# Altium PCB Sinistro_ASP_RevA.PcbDoc (part 2 of 5)
Units mm, origin at the board's own origin, x right, y up, seen from the top; angles counter-clockwise.
Board outline 150 x 110 mm, 8 copper layers (Top Layer (.GTL), MidLayer1 (.G1), +28V and VCC (.GP1), A and D grounds (.GP2), Earth GND (.GP3), +5ANA (.GP4), -5ANA (.GP5), Bottom Layer (.GBL)); 383 components, 275 nets, 1751 pads, 521 vias.
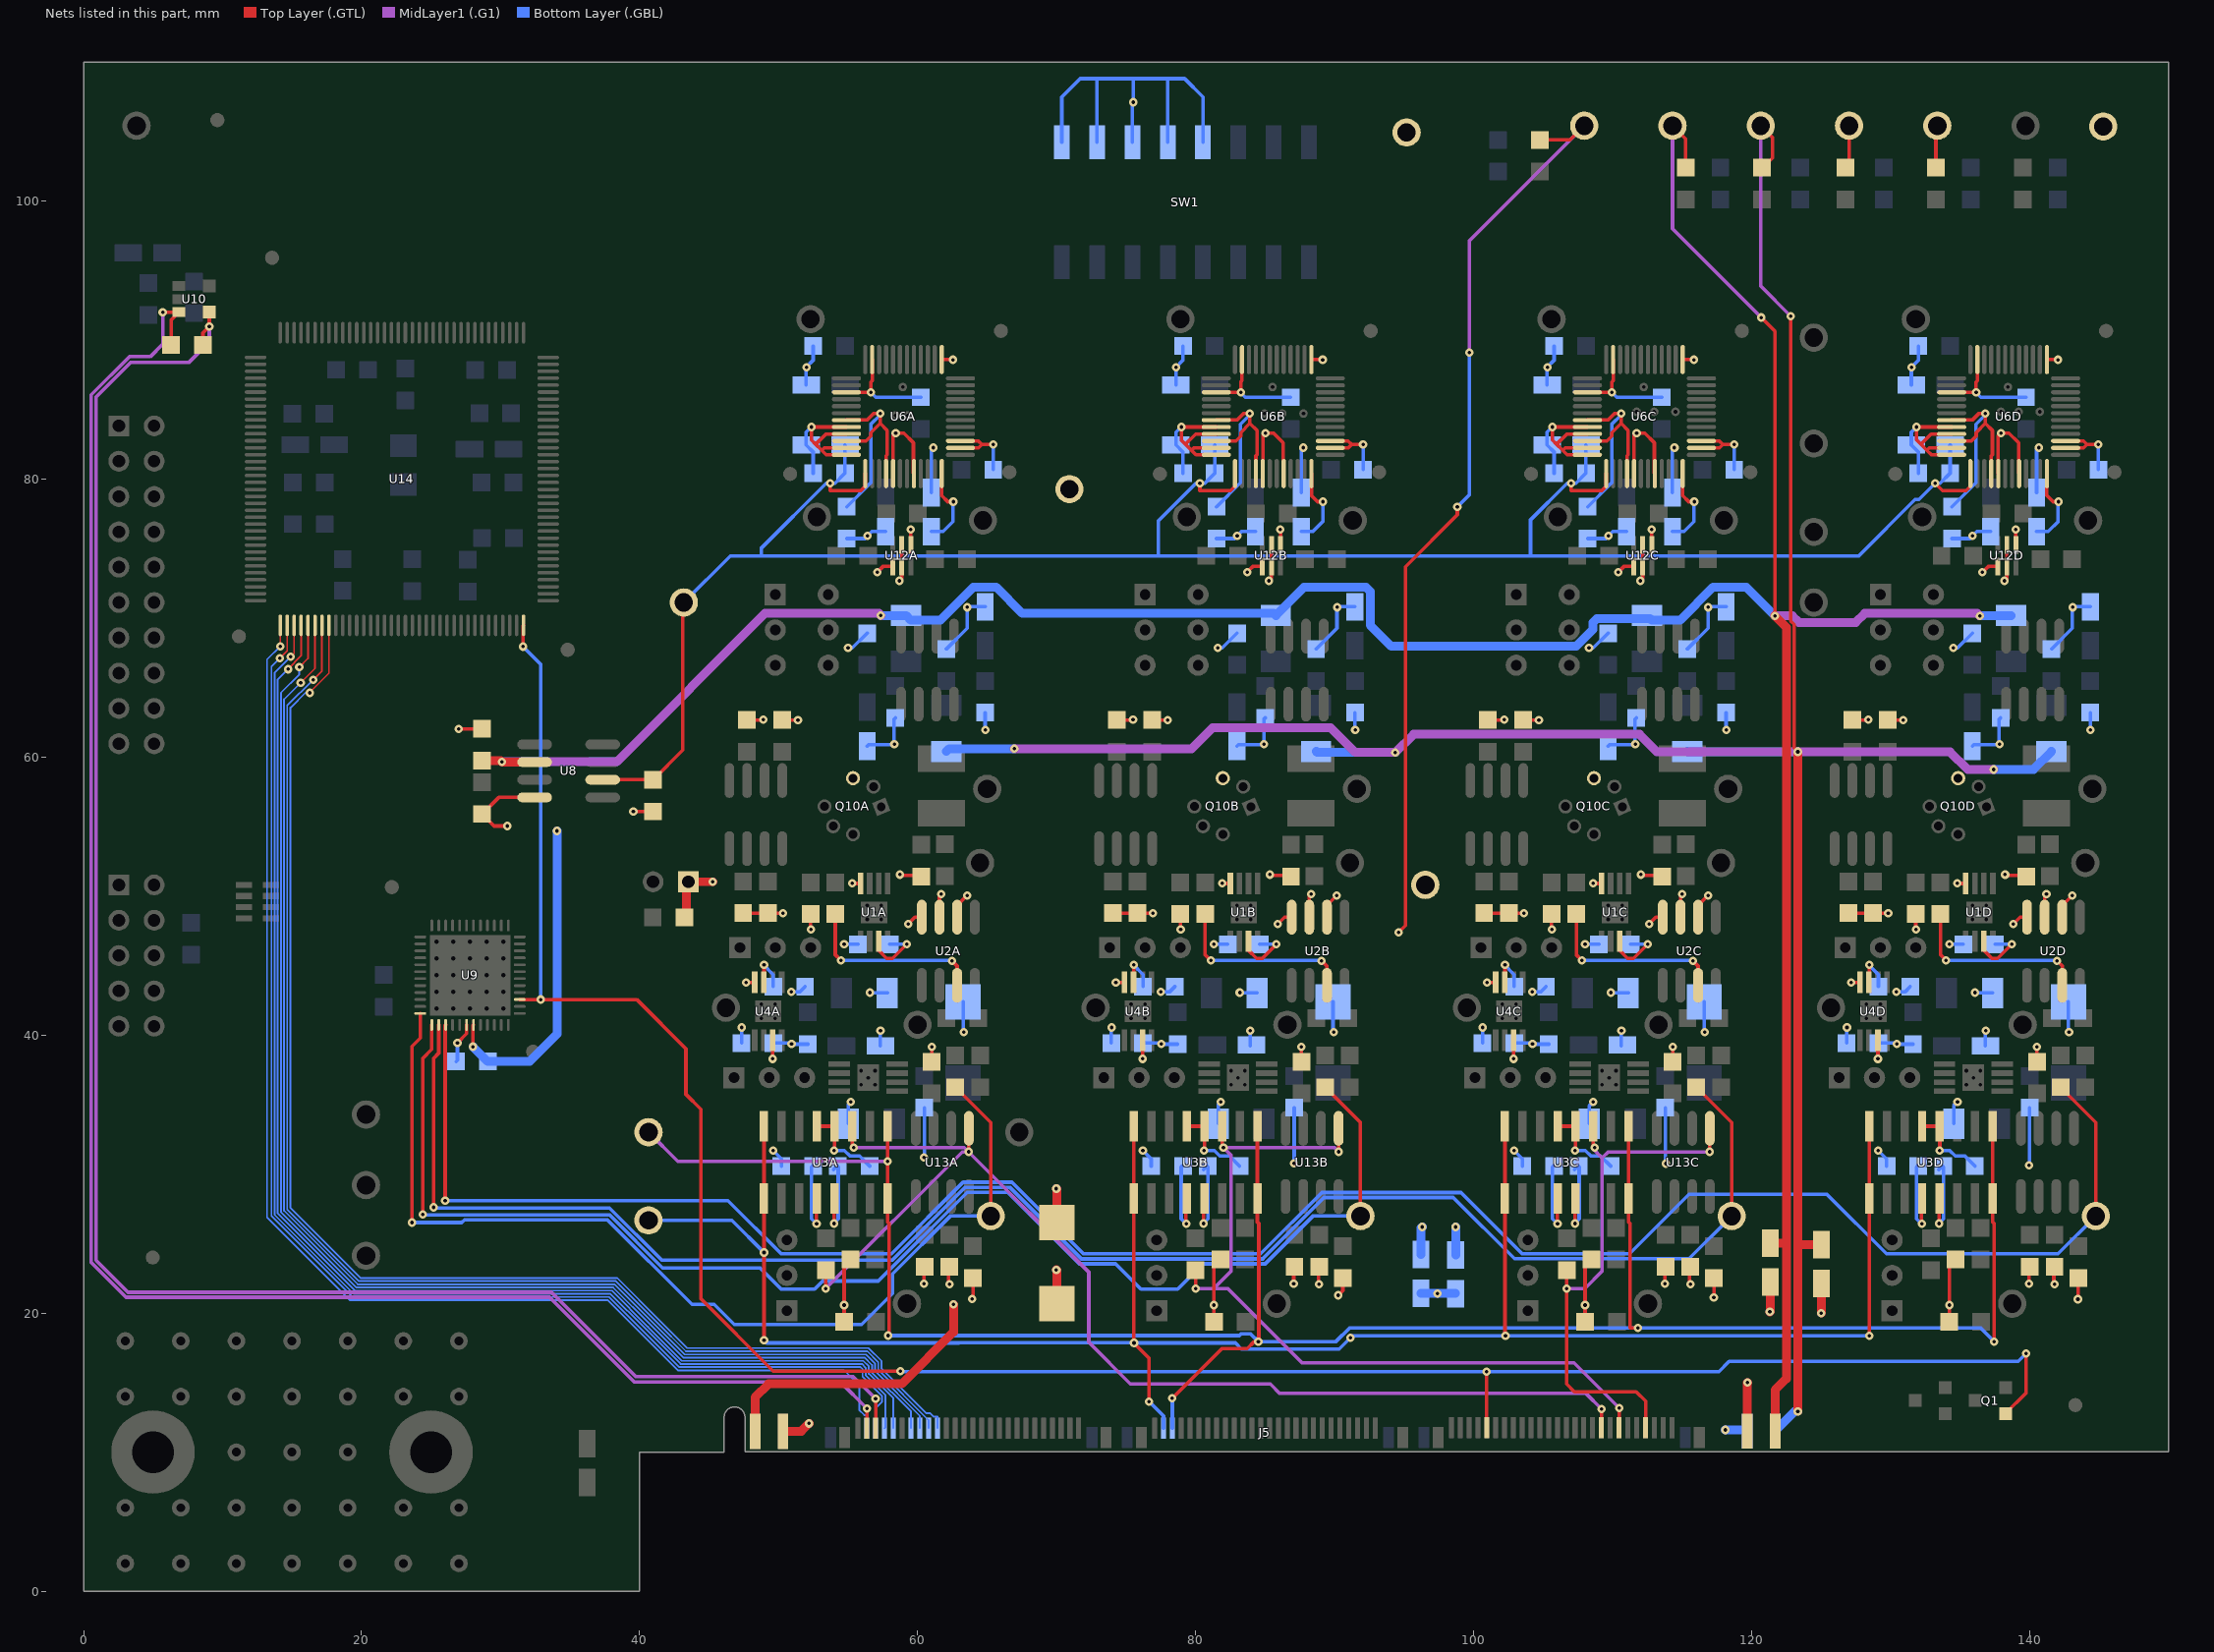
[diagram p8: the nets of this part, all layers, seen from the top]

## Part data
C1A C1B C1C C1D C2 C7 C8A C8B C8C C8D C17A C17B C17C C17D C18A C18B C18C C18D C19A C19B C19C C19D C20A C20B C20C C20D C22A C22B C22C C22D C23A C23B C23C C23D C25A C25B C25C C25D C26A C26B C26C C26D C27 C28A C28B C28C C28D C29A C29B C29C C29D C33 C34 C35 C36 C37 C38 C39 C40 C41 C42 C43 C47 C49A C49B C49C C49D C50 C51 C52 C56 C60 C61: "Capacitor"
C3A C3B C3C C3D C4A C4B C4C C4D C5A C5B C5C C5D C6A C6B C6C C6D C9A C9B C9C C9D C11A C11B C11C C11D C12A C12B C12C C12D C13A C13B C13C C13D C14A C14B C14C C14D C46A C46B C46C C46D: library part "Cap SMD", "Capacitor"
C10A C10B C10C C10D C59: library part "Cap Tant 35V", "outline 6.0mm x 3.2mm"
C15A C15B C15C C15D C16A C16B C16C C16D C21A C21B C21C C21D C24A C24B C24C C24D C31A C31B C31C C31D C32 C44 C45 C48A C48B C48C C48D C53 C54 C55 C57 C58: library part "Cap Tant 15V", "outline 3.2mm x 1.6mm"
C30A C30B C30C C30D: library part "Cap Pol1"
D1 D2 D3 D4 D5 D6: "Typical BLUE SiC LED"
J5: "SAMTEC QMSS W/PWR PINS"
L5: library part INDUCTOR1
P1: "Header, 10-Pin, Dual row"
P2: "Header, 2-Pin"
P3: "Header, 5-Pin, Dual row"
Q1: "P-MOSFET LOGIC LEVEL"
Q10A Q10B Q10C Q10D: "N-JFET NJ450L Process"
R1A R1B R1C R1D R2A R2B R2C R2D R5A R5B R5C R5D: library part "Res Match Pair"
R3A R3B R3C R3D R4A R4B R4C R4D R6A R6B R6C R6D R7A R7B R7C R7D R9A R9B R9C R9D R10A R10B R10C R10D R11A R11B R11C R11D R12A R12B R12C R12D R13A R13B R13C R13D R14A R14B R14C R14D R15A R15B R15C R15D R16A R16B R16C R16D R17A R17B R17C R17D R20A R20B R20C R20D R21 R22 R23 R24 R25 R26 R27: "Resistor"
R8A R8B R8C R8D: library part "Res Matched Quad"
R18A R18B R18C R18D R19A R19B R19C R19D: library part Res2, "Resistor"
RN1: "Resistor Array 4 Isolated"
SW1: "SW-SMD 8-pos SPST"
TP1A TP1B TP1C TP1D TP2A TP2B TP2C TP2D TP3A TP3B TP3C TP3D TP4A TP4B TP4C TP4D TP5A TP5B TP5C TP5D TP6A TP6B TP6C TP6D TP7A TP7B TP7C TP7D TP8 TP9A TP9B TP9C TP9D TP10A TP10B TP10C TP10D TP11 TP12 TP13 TP19 TP20 TP21 TP22 TP23 TP24 TP26: "Test Point"
TP14 TP15 TP16 TP17 TP18 TP25 TP27 TP28 TP29 TP30 TP31: library part "Test point", "Test Point"
U1A U1B U1C U1D U4A U4B U4C U4D U5A U5B U5C U5D: "Low Noise, High Speed Amplifier"
U3A U3B U3C U3D: "DG213 QUAD NO/NC"
U6A U6B U6C U6D: library part ADS8422, "AD8422"
U7A U7B U7C U7D: "DIFF AMP"
U8: library part VRE3401, "VREF 4.096V"
U9: "12-Bit MultChan ADC/DAC"
U11A U11B U11C U11D U13A U13B U13C U13D: "Dual Matched NPN"
U12A U12B U12C U12D: library part "Diode array", "Dual series array"
U14: "MAX II 3.3/2.5V CPLD, 116 IOs, 570 Logic Elements, 144-Pin Plastic TQFP, Commercial Temperature, Speed Grade 3"
U15: "Silicon Serial Number"

## Free pads (board coordinates)
  round 1.27 hole 0.635: 0(3,2) 0(3,6) 0(3,14) 0(3,18) 0(7,2) 0(7,6) 0(7,14) 0(7,18) 1(11,2) 1(11,6) 1(11,10) 1(11,14) 1(11,18) 2(15,2) 2(15,6) 2(15,10) 2(15,14) 2(15,18) 3(19,2) 3(19,6) 3(19,10) 3(19,14) 3(19,18) 4(23,2) 4(23,6) 4(23,14) 4(23,18) 5(27,2) 5(27,6) 5(27,14) 5(27,18)
  round 6 hole 3: 0(5,10) 1(25,10)
  round 0.61 hole 0.254: 1(58.93,86.614) 1(85.53,86.614) 1(112.23,86.614) 1(138.43,86.614) 2(58.42,84.582) 2(84.963,84.709) 2(111.722,84.836) 2(137.922,84.836) 3(87.757,84.709) 3(114.516,84.836) 3(140.716,84.836) 4(59.309,84.582) 4(86.233,84.709) 4(112.992,84.836) 4(139.192,84.836)
  round 1.016 smd mask+1.016: ""(4.978,24.003) ""(9.627,105.816) ""(143.281,13.386)
  round 1.016 smd mask+0.508: ""(11.176,68.682) ""(13.564,95.91) ""(22.174,50.648) ""(32.334,38.811) ""(34.823,67.716) ""(50.825,80.366) ""(65.989,90.653) ""(66.599,80.493) ""(77.425,80.366) ""(92.589,90.653) ""(93.199,80.493) ""(104.125,80.366) ""(119.289,90.653) ""(119.899,80.493) ""(130.325,80.366) ""(145.489,90.653) ""(146.099,80.493)

## Via types
v1: diameter 0.61, hole 0.254, Top Layer (.GTL) to Bottom Layer (.GBL), 521 vias

## Nets (pads, with @x,y where several pads share a name; then routed paths per layer and width w, separated by ;. In a path a pad name is that pad's centre, name@x,y a point inside that pad or via, vN(x,y) a via of type N, cw(c..) or ccw(c..) an arc to the next point about the centre after c; other vN are vias at no path point)
4.096VREF: C7.2 C24A.1 C24B.1 C24C.1 C24D.1 C25A.2 C25B.2 C25C.2 C25D.2 TP8.1 U6A.1 U6B.1 U6C.1 U6D.1 U8.6 | length 161
  Top Layer (.GTL) w0.254: U8.6@37.35,58.369 C7.2@40.97,58.369 43.104,60.503 TP8.1@43.104,71.12 ; 53.7,79.173 55.915,79.173 56.231,79.49 U6A.1@56.231,80.389 ; 53.7,79.194 v1(53.7,79.7) ; 80.3,79.173 82.515,79.173 82.831,79.49 U6B.1@82.831,80.389 ; 80.3,79.184 v1(80.3,79.7) ; 107,79.173 109.215,79.173 109.531,79.49 U6C.1@109.531,80.389 ; 107,79.239 v1(107,79.7) ; v1(133.2,79.7) 133.727,79.173 135.415,79.173 135.731,79.49 U6D.1@135.731,80.389
  Bottom Layer (.GBL) w0.254: TP8.1@43.18,71.12 46.533,74.473 48.768,74.473 ; C24A.1@54.772,82.45 C25A.2@54.772,80.418 54.054,79.7 v1(53.7,79.7) 53.423,79.7 48.768,75.045 48.768,74.473 ; C24B.1@81.372,82.45 C25B.2@81.372,80.418 80.654,79.7 v1(80.3,79.7) 80.023,79.7 77.318,76.995 77.318,74.473 ; C24C.1@108.072,82.45 C25C.2@108.072,80.418 107.354,79.7 v1(107,79.7) 106.723,79.7 104.089,77.066 104.089,74.473 ; C24D.1@134.272,82.45 C25D.2@134.272,80.418 133.554,79.7 v1(133.2,79.7) 132.02,78.52 131.743,78.52 127.696,74.473 104.089,74.473 ; 48.768,74.473 77.318,74.473 ; 77.318,74.473 104.089,74.473
+5ANA: C5A.2 C5B.2 C5C.2 C5D.2 C11A.2 C11B.2 C11C.2 C11D.2 C20A.2 C20B.2 C20C.2 C20D.2 C21A.1 C21B.1 C21C.1 C21D.1 C35.2 C58.1 D5.ANOD J5.PC03 R3A.1 R3B.1 R3C.1 R3D.1 R4A.1 R4B.1 R4C.1 R4D.1 TP27.1 U2A.7 U2B.7 U2C.7 U2D.7 U3A.12 U3B.12 U3C.12 U3D.12 U4A.7 U4B.7 U4C.7 U4D.7 U6A.4 U6A.43 U6A.46 U6B.4 U6B.43 U6B.46 U6C.4 U6C.43 U6C.46 U6D.4 U6D.43 U6D.46 U9.18 U12A.2 U12A.5 U12B.2 U12B.5 U12C.2 U12C.5 U12D.2 U12D.5 | length 201.1
  Top Layer (.GTL) w0.254: v1(26.899,39.446) 27.55,40.098 U9.18@27.55,40.735 ; v1(49.578,38.291) U4A.7@49.578,39.64 ; U3A.12@52.707,28.244 52.707,26.45 v1(52.733,26.424) ; R4A.1@54.079,48.7 54.079,45.779 v1(54.485,45.373) ; U6A.46@54.881,82.739 56.291,82.739 56.644,83.092 56.644,83.344 57.3,84 ; U6A.43@54.881,84.239 56.361,84.239 56.822,84.7 v1(57.3,84.7) 57.3,84 ; U6A.4@57.731,80.389 57.731,81.664 57.813,81.745 57.813,83.487 57.3,84 ; v1(58.676,72.678) 58.854,72.855 U12A.5@58.854,75.256 ; v1(58.727,51.545) 58.778,51.494 R3A.1@59.921,51.494 ; v1(62.461,45.347) 62.842,44.966 U2A.7@62.842,43.583 ; v1(76.178,38.291) U4B.7@76.178,39.64 ; U3B.12@79.307,28.244 79.307,26.45 v1(79.333,26.424) ; R4B.1@80.679,48.7 80.679,45.779 v1(81.085,45.373) ; U6B.46@81.481,82.739 82.891,82.739 83.244,83.092 83.244,83.344 83.9,84 ; U6B.43@81.481,84.239 82.961,84.239 83.422,84.7 v1(83.9,84.7) 83.9,84 ; U6B.4@84.331,80.389 84.331,81.664 84.413,81.745 84.413,83.487 83.9,84 ; v1(85.276,72.678) 85.454,72.855 U12B.5@85.454,75.256 ; v1(85.327,51.545) 85.378,51.494 R3B.1@86.521,51.494 ; v1(89.061,45.347) 89.442,44.966 U2B.7@89.442,43.583 ; v1(102.878,38.291) U4C.7@102.878,39.64 ; U3C.12@106.007,28.244 106.007,26.45 v1(106.033,26.424) ; R4C.1@107.379,48.7 107.379,45.779 v1(107.785,45.373) ; U6C.46@108.181,82.739 109.591,82.739 109.944,83.092 109.944,83.344 110.6,84 ; U6C.43@108.181,84.239 109.661,84.239 110.122,84.7 v1(110.6,84.7) 110.6,84 ; U6C.4@111.031,80.389 111.031,81.664 111.113,81.745 111.113,83.487 110.6,84 ; v1(111.976,72.678) 112.154,72.855 U12C.5@112.154,75.256 ; v1(112.027,51.545) 112.078,51.494 R3C.1@113.221,51.494 ; v1(115.761,45.347) 116.142,44.966 U2C.7@116.142,43.583 ; D5.ANOD@126.75,102.393 127,102.643 TP27.1@127,105.41 ; v1(129.078,38.291) U4D.7@129.078,39.64 ; U3D.12@132.207,28.244 132.207,26.45 v1(132.233,26.424) ; R4D.1@133.579,48.7 133.579,45.779 v1(133.985,45.373) ; U6D.46@134.381,82.739 135.791,82.739 136.144,83.092 136.144,83.344 136.8,84 ; U6D.43@134.381,84.239 135.861,84.239 136.322,84.7 v1(136.8,84.7) 136.8,84 ; U6D.4@137.231,80.389 137.231,81.664 137.313,81.745 137.313,83.487 136.8,84 ; v1(138.176,72.678) 138.354,72.855 U12D.5@138.354,75.256 ; v1(138.227,51.545) 138.278,51.494 R3D.1@139.421,51.494 ; v1(141.961,45.347) 142.342,44.966 U2D.7@142.342,43.583
  Top Layer (.GTL) w0.635: J5.PC03@119.685,12.315 J5.PC03@119.685,11.515 119.685,14.985 v1(119.7,15)
  Bottom Layer (.GBL) w0.254: C35.2@26.797,38.1 26.899,38.202 v1(26.899,39.446) ; v1(50.9,43.1) 51.515,43.1 C11A.2@51.901,43.486 ; C5A.2@52.435,30.583 52.359,30.507 52.359,26.773 v1@52.714,26.417 ; v1@54.467,45.366 62.417,45.366 v1@62.442,45.34 ; C20A.2@54.899,78.005 56.626,79.732 56.626,83.926 57.3,84.6 v1(57.3,84.7) ; C21A.1@60.995,79.021 60.995,82.12 v1@61.122,82.247 ; v1(77.5,43.1) 78.115,43.1 C11B.2@78.501,43.486 ; C5B.2@79.035,30.583 78.959,30.507 78.959,26.773 v1@79.314,26.417 ; v1@81.067,45.366 89.017,45.366 v1@89.042,45.34 ; C20B.2@81.499,78.005 83.226,79.732 83.226,83.926 83.9,84.6 v1(83.9,84.7) ; C21B.1@87.595,79.021 87.595,82.12 v1@87.722,82.247 ; v1(104.2,43.1) 104.815,43.1 C11C.2@105.201,43.486 ; C5C.2@105.735,30.583 105.659,30.507 105.659,26.773 v1@106.014,26.417 ; v1@107.767,45.366 115.717,45.366 v1@115.742,45.34 ; C20C.2@108.199,78.005 109.926,79.732 109.926,83.926 110.6,84.6 v1(110.6,84.7) ; C21C.1@114.295,79.021 114.295,82.12 v1@114.422,82.247 ; v1(130.4,43.1) 131.015,43.1 C11D.2@131.401,43.486 ; C5D.2@131.935,30.583 131.859,30.507 131.859,26.773 v1@132.214,26.417 ; v1@133.967,45.366 141.917,45.366 v1@141.942,45.34 ; C20D.2@134.399,78.005 136.126,79.732 136.126,83.926 136.8,84.6 v1(136.8,84.7) ; C21D.1@140.495,79.021 140.495,82.12 v1@140.622,82.247
  Bottom Layer (.GBL) w0.635: C58.1@96.215,24.206 96.215,26.115 v1(96.3,26.2)
  other v1: 54.485,45.373 81.085,45.373 107.785,45.373 133.985,45.373 61.14,82.253 87.74,82.253 114.44,82.253 140.64,82.253
+12V: C57.1 C60.2 D4.ANOD J5.PC01 L3A.1 L3B.1 L3C.1 L3D.1 TP25.1 U8.2 | length 228.7
  Top Layer (.GTL) w0.254: TP25.1@114.3,105.41 115.25,104.46 D4.ANOD@115.25,102.393 ; v1(120.675,91.618) 121.666,90.627 v1(121.666,70.155)
  Top Layer (.GTL) w0.635: C60.2@28.677,59.741 30.023,59.741 v1(30.099,59.665) 30.124,59.639 U8.2@32.45,59.639 ; C57.1@121.336,25.019 122.419,25.019 122.5,25.1 ; v1(121.666,70.155) 122.5,69.321 122.5,25.1 ; J5.PC01@121.689,11.538 J5.PC01@121.689,11.515 121.689,14.47 122.5,15.281 122.5,25.1
  MidLayer1 (.G1) w0.254: TP25.1@114.3,105.41 114.3,97.993 v1(120.675,91.618)
  MidLayer1 (.G1) w0.635: v1(30.099,59.665) 38.354,59.665 49.017,70.328 57.205,70.328 v1(57.353,70.18) ; v1(121.666,70.155) 122.926,70.155 123.396,69.685 127.485,69.685 128.129,70.328 136.225,70.328 v1(136.398,70.155)
  Bottom Layer (.GBL) w0.635: v1(57.353,70.18) 57.355,70.182 L3A.1@59.166,70.182 59.502,69.845 61.628,69.845 64.009,72.226 65.639,72.226 67.537,70.328 85.619,70.328 L3B.1@85.766,70.182 87.811,72.226 92.239,72.226 92.558,71.907 92.558,69.493 94.085,67.966 107.36,67.966 108.578,69.184 108.578,69.681 108.863,69.966 112.682,69.966 112.802,69.845 114.842,69.845 117.222,72.226 119.595,72.226 v1(121.666,70.155) ; v1(136.398,70.155) 138.639,70.155 L3D.1@138.666,70.182
+28V: C3A.2 C3B.2 C3C.2 C3D.2 C4A.2 C4B.2 C4C.2 C4D.2 C59.POS D3.ANOD J5.PC05 L1A.2 L1B.2 L1C.2 L1D.2 R14A.2 R14B.2 R14C.2 R14D.2 TP28.1 U1A.7 U1B.7 U1C.7 U1D.7 U3A.13 U3B.13 U3C.13 U3D.13 | length 128
  Top Layer (.GTL) w0.254: v1(53.977,26.45) U3A.13@53.977,28.244 ; U1A.7@57.198,46.752 57.198,46.104 57.777,45.525 58.194,45.525 v1(59.21,46.541) ; R14A.2@62.232,23.351 62.232,22.132 v1(62.283,22.081) ; v1(80.577,26.45) U3B.13@80.577,28.244 ; U1B.7@83.798,46.752 83.798,46.104 84.377,45.525 84.794,45.525 v1(85.81,46.541) ; R14B.2@88.832,23.351 88.832,22.132 v1(88.883,22.081) ; v1(94.6,47.4) 95.085,47.885 95.085,73.691 98.824,77.43 v1(98.824,78) ; D3.ANOD@104.75,104.393 106.933,104.393 TP28.1@107.95,105.41 ; v1(107.277,26.45) U3C.13@107.277,28.244 ; U1C.7@110.498,46.752 110.498,46.104 111.077,45.525 111.494,45.525 v1(112.51,46.541) ; R14C.2@115.532,23.351 115.532,22.132 v1(115.583,22.081) ; v1(133.477,26.45) U3D.13@133.477,28.244 ; U1D.7@136.698,46.752 136.698,46.104 137.277,45.525 137.694,45.525 v1(138.71,46.541) ; R14D.2@141.732,23.351 141.732,22.132 v1(141.783,22.081)
  Top Layer (.GTL) w0.635: J5.PC05@50.315,11.502 51.634,11.502 v1(52.197,12.065) ; v1(69.977,23.114) 70.002,23.089 C59.POS@70.002,20.676
  MidLayer1 (.G1) w0.254: v1(99.7,89.1) 99.7,97.16 TP28.1@107.95,105.41
  Bottom Layer (.GBL) w0.254: v1@53.959,26.443 54.289,26.773 54.289,30.507 C4A.2@54.213,30.583 ; C4A.2@53.959,30.329 C4A.2@54.213,30.583 ; C4A.2@54.264,30.532 C4A.2@54.213,30.583 ; L1A.2@55.026,33.631 55.026,35.026 55.3,35.3 v1(55.2,35.2) ; C3A.2@57.997,46.534 v1@59.191,46.534 ; v1@80.559,26.443 80.889,26.773 80.889,30.507 C4B.2@80.813,30.583 ; C4B.2@80.559,30.329 C4B.2@80.813,30.583 ; C4B.2@80.864,30.532 C4B.2@80.813,30.583 ; L1B.2@81.626,33.631 81.626,35.026 v1(81.8,35.2) ; C3B.2@84.597,46.534 v1@85.791,46.534 ; v1(98.824,78) 99.7,78.876 v1(99.7,89.1) ; v1@107.259,26.443 107.589,26.773 107.589,30.507 C4C.2@107.513,30.583 ; C4C.2@107.259,30.329 C4C.2@107.513,30.583 ; C4C.2@107.564,30.532 C4C.2@107.513,30.583 ; L1C.2@108.326,33.631 108.326,34.926 v1(108.6,35.2) ; C3C.2@111.297,46.534 v1@112.491,46.534 ; v1@133.459,26.443 133.789,26.773 133.789,30.507 C4D.2@133.713,30.583 ; C4D.2@133.459,30.329 C4D.2@133.713,30.583 ; C4D.2@133.764,30.532 C4D.2@133.713,30.583 ; L1D.2@134.526,33.631 134.526,34.926 v1(134.8,35.2) ; C3D.2@137.497,46.534 v1@138.691,46.534
  other v1: 62.283,22.081 88.883,22.081 115.583,22.081 141.783,22.081
+CLK_100: J5.153 R21.1 U10.3 | length 136.7
  Top Layer (.GTL) w0.254: v1(5.693,92.005) U10.3@6.862,92.005 6.303,91.446 R21.1@6.303,89.643 ; J5.153@56.348,11.729 56.348,13.117 v1(56.363,13.132)
  MidLayer1 (.G1) w0.254: v1(5.693,92.005) 5.693,89.693 4.8,88.8 3.297,88.8 0.544,86.047 0.544,23.653 3.053,21.144 33.522,21.144 39.604,15.062 54.432,15.062 v1(56.363,13.132)
-5ANA: C14A.2 C14B.2 C14C.2 C14D.2 C46A.1 C46B.1 C46C.1 C46D.1 C53.2 D2.CATH J5.PC04 L2A.2 L2B.2 L2C.2 L2D.2 R15A.2 R15B.2 R15C.2 R15D.2 R16A.2 R16B.2 R16C.2 R16D.2 TP30.1 U2A.3 U2B.3 U2C.3 U2D.3 U4A.4 U4B.4 U4C.4 U4D.4 | length 41.8
  Top Layer (.GTL) w0.254: R16A.2@47.45,48.776 v1(50.32,48.776) ; v1(47.661,43.79) U4A.4@48.278,43.79 ; R15A.2@47.729,62.67 48.872,62.67 v1(48.897,62.695) ; U2A.3@61.572,48.483 61.572,50.021 v1(61.699,50.148) ; R16B.2@74.05,48.776 v1(76.92,48.776) ; v1(74.261,43.79) U4B.4@74.878,43.79 ; R15B.2@74.329,62.67 75.472,62.67 v1(75.497,62.695) ; U2B.3@88.172,48.483 88.172,50.021 v1(88.299,50.148) ; R16C.2@100.75,48.776 v1(103.62,48.776) ; v1(100.961,43.79) U4C.4@101.578,43.79 ; R15C.2@101.029,62.67 102.172,62.67 v1(102.197,62.695) ; U2C.3@114.872,48.483 114.872,50.021 v1(114.999,50.148) ; R16D.2@126.95,48.776 v1(129.82,48.776) ; v1(127.161,43.79) U4D.4@127.778,43.79 ; R15D.2@127.229,62.67 128.372,62.67 v1(128.397,62.695) ; D2.CATH@133.25,102.393 133.25,105.31 TP30.1@133.35,105.41 ; U2D.3@141.072,48.483 141.072,50.021 v1(141.199,50.148)
  Bottom Layer (.GBL) w0.254: C14A.2@47.329,39.422 v1@47.329,40.54 ; v1@56.55,43.054 56.575,43.029 L2A.2@57.82,43.029 ; C14B.2@73.929,39.422 v1@73.929,40.54 ; v1@83.15,43.054 83.175,43.029 L2B.2@84.42,43.029 ; C14C.2@100.629,39.422 v1@100.629,40.54 ; v1@109.85,43.054 109.875,43.029 L2C.2@111.12,43.029 ; C14D.2@126.829,39.422 v1@126.829,40.54 ; v1@136.05,43.054 136.075,43.029 L2D.2@137.32,43.029
  Bottom Layer (.GBL) w0.635: v1(98.7,26.2) 98.704,26.196 C53.2@98.704,24.181 ; v1(118.1,11.6) 119.6,11.6 J5.PC04@119.685,11.515
  other v1: 47.348,40.547 73.948,40.547 100.648,40.547 126.848,40.547 56.568,43.061 83.168,43.061 109.868,43.061 136.068,43.061
-12V: C54.2 D1.CATH J5.PC02 L4A.1 L4B.1 L4C.1 L4D.1 TP31.1 | length 198
  Top Layer (.GTL) w0.254: TP31.1@120.65,105.41 121.5,104.56 121.5,103.1 120.793,102.393 D1.CATH@120.75,102.393 ; v1(122.809,91.719) 122.809,69.784 123.046,69.547 123.046,60.647 v1(123.317,60.376)
  Top Layer (.GTL) w0.635: v1(123.317,12.929) 123.317,24.9 ; v1(123.317,60.376) 123.317,24.9 ; C54.2@125.019,24.943 123.36,24.943 123.317,24.9
  MidLayer1 (.G1) w0.254: TP31.1@120.65,105.41 120.65,93.878 v1(122.809,91.719)
  MidLayer1 (.G1) w0.635: v1(66.954,60.604) 79.705,60.604 81.204,62.103 89.713,62.103 91.491,60.325 v1(94.361,60.325) 95.677,61.641 111.921,61.641 113.186,60.376 v1(123.317,60.376) 134.263,60.376 135.533,59.106 v1(137.414,59.106)
  Bottom Layer (.GBL) w0.635: L4A.1@62.061,60.403 62.263,60.604 v1(66.954,60.604) ; L4B.1@88.661,60.403 88.739,60.325 v1(94.361,60.325) ; L4C.1@115.361,60.403 115.388,60.376 v1(123.317,60.376) ; J5.PC02@121.689,11.515 123.103,12.929 v1(123.317,12.929) ; v1(137.414,59.106) 140.265,59.106 L4D.1@141.561,60.403
-CLK_100: J5.151 R21.2 U10.4 | length 137.9
  Top Layer (.GTL) w0.254: R21.2@8.589,89.643 8.589,90.507 v1(9.046,90.964) U10.4@9.046,92.005 ; v1(56.972,13.843) 56.983,13.833 J5.151@56.983,11.729
  MidLayer1 (.G1) w0.254: v1(9.046,90.964) 9.046,89.846 7.6,88.4 3.4,88.4 0.9,85.9 0.9,23.8 3.2,21.5 33.669,21.5 39.726,15.443 55.372,15.443 v1(56.972,13.843)
/GAIN_4X: J5.102 TP21.1 U3A.8 U3A.9 U3B.8 U3B.9 U3C.8 U3C.9 U3D.8 U3D.9 | length 157.8
  Top Layer (.GTL) w0.254: v1(48.948,18.059) v1(48.948,24.359) U3A.9@48.948,28.244 U3A.8@48.948,33.444 ; v1@75.548,17.678 v1@75.548,17.856 ; U3B.8@75.548,33.444 U3B.9@75.548,28.244 v1@75.548,17.856 ; v1(76.632,13.64) 76.632,16.773 v1@75.548,17.856 ; v1@102.248,18.364 U3C.9@102.248,28.244 U3C.8@102.248,33.444 ; v1@128.448,18.364 U3D.9@128.448,28.244 U3D.8@128.448,33.444
  Bottom Layer (.GBL) w0.254: TP21.1@40.64,26.67 46.637,26.67 v1(48.948,24.359) ; v1(48.948,18.059) 49.151,17.856 58.108,17.856 58.133,17.882 58.158,17.856 62.949,17.856 62.974,17.882 75.54,17.882 v1(75.565,17.856) 82.862,17.856 83.294,17.424 90.322,17.424 v1(91.135,18.237) 91.262,18.364 v1(102.286,18.364) v1(128.448,18.364) v1@128.448,18.39 ; v1(76.632,13.64) 76.657,13.64 77.688,12.609 J5.102@77.688,11.729
/RESET_BLANK: J5.100 TP20.1 U3A.1 U3A.16 U3B.1 U3B.16 U3C.1 U3C.16 U3D.1 U3D.16 | length 170.1
  Top Layer (.GTL) w0.254: U3A.1@57.838,33.444 U3A.16@57.838,28.244 57.838,26.551 57.94,26.45 v1@57.94,18.39 ; v1(78.308,13.868) 81.89,17.45 83.711,17.45 84.193,17.932 84.54,17.932 84.54,26.45 84.438,26.551 U3B.16@84.438,28.244 U3B.1@84.438,33.444 ; U3C.1@111.138,33.444 U3C.16@111.138,28.244 111.138,26.551 111.24,26.45 111.24,18.923 v1(111.799,18.923) ; U3D.1@137.338,33.444 U3D.16@137.338,28.244 137.338,26.551 137.44,26.45 v1(137.44,17.958)
  MidLayer1 (.G1) w0.254: TP20.1@40.64,33.02 42.748,30.912 v1(57.836,30.912)
  Bottom Layer (.GBL) w0.254: v1(57.887,18.39) 83.142,18.39 83.269,18.517 83.947,18.517 v1(84.506,17.958) 90.094,17.958 91.059,18.923 v1(111.799,18.923) 136.475,18.923 v1(137.44,17.958) ; v1(78.308,13.868) 78.323,13.854 J5.100@78.323,11.729
A: C3A.1 C3B.1 C3C.1 C3D.1 C4A.1 C4B.1 C4C.1 C4D.1 C5A.1 C5B.1 C5C.1 C5D.1 C7.1 C8A.1 C8B.1 C8C.1 C8D.1 C9A.2 C9B.2 C9C.2 C9D.2 C10A.NEG C10B.NEG C10C.NEG C10D.NEG C11A.1 C11B.1 C11C.1 C11D.1 C12A.1 C12B.1 C12C.1 C12D.1 C13A.1 C13B.1 C13C.1 C13D.1 C14A.1 C14B.1 C14C.1 C14D.1 C15A.1 C15B.1 C15C.1 C15D.1 C16A.2 C16B.2 C16C.2 C16D.2 C17A.1 C17B.1 C17C.1 C17D.1 C18A.2 C18B.2 C18C.2 C18D.2 C19A.2 C19B.2 C19C.2 C19D.2 C20A.1 C20B.1 C20C.1 C20D.1 C21A.2 C21B.2 C21C.2 C21D.2 C22A.1 C22B.1 C22C.1 C22D.1 C23A.1 C23B.1 C23C.1 C23D.1 C24A.2 C24B.2 C24C.2 C24D.2 C25A.1 C25B.1 C25C.1 C25D.1 C26A.2 C26B.2 C26C.2 C26D.2 C28A.2 C28B.2 C28C.2 C28D.2 C29A.1 C29B.1 C29C.1 C29D.1 C30A.2 C30B.2 C30C.2 C30D.2 C31A.1 C31B.1 C31C.1 C31D.1 C35.1 C48A.2 C48B.2 C48C.2 C48D.2 C53.1 C54.1 C56.1 C57.2 C58.2 C59.NEG C60.1 C61.1 J5.PC07 P2.1 Q10A.3 Q10B.3 Q10C.3 Q10D.3 R11A.1 R11B.1 R11C.1 R11D.1 R12A.1 R12B.1 R12C.1 R12D.1 R17A.1 R17B.1 R17C.1 R17D.1 R20A.1 R20B.1 R20C.1 R20D.1 SW1.9 SW1.10 SW1.11 SW1.12 SW1.13 TP14.1 TP15.1 TP16.1 TP17.1 U1A.4 U1B.4 U1C.4 U1D.4 U2A.2 U2A.4 U2B.2 U2B.4 U2C.2 U2C.4 U2D.2 U2D.4 U3A.4 U3A.5 U3B.4 U3B.5 U3C.4 U3C.5 U3D.4 U3D.5 U4A.3 U4B.3 U4C.3 U4D.3 U6A.5 U6A.8 U6A.12 U6A.14 U6A.15 U6A.25 U6A.35 U6A.39 U6A.44 U6A.45 U6A.47 U6A.48 U6B.5 U6B.8 U6B.12 U6B.14 U6B.15 U6B.25 U6B.35 U6B.39 U6B.44 U6B.45 U6B.47 U6B.48 U6C.5 U6C.8 U6C.12 U6C.14 U6C.15 U6C.25 U6C.35 U6C.39 U6C.44 U6C.45 U6C.47 U6C.48 U6D.5 U6D.8 U6D.12 U6D.14 U6D.15 U6D.25 U6D.35 U6D.39 U6D.44 U6D.45 U6D.47 U6D.48 U8.4 U9.19 U12A.1 U12A.4 U12B.1 U12B.4 U12C.1 U12C.4 U12D.1 U12D.4 | length 492.3
  Top Layer (.GTL) w0.254: v1(26.975,62.027) C60.1@28.677,62.027 ; v1(28.016,39.167) 28.016,40.701 U9.19@28.05,40.735 ; v1(30.48,55.042) 29.54,55.042 C61.1@28.677,55.905 29.794,57.023 29.87,57.099 U8.4@32.45,57.099 ; v1(39.548,56.083) C7.1@40.97,56.083 ; U4A.3@48.928,43.79 48.948,43.81 v1(48.948,45.042) ; R12A.1@50.269,62.67 51.361,62.67 v1(51.387,62.645) ; C8A.1@52.301,48.7 52.301,47.633 v1(52.326,47.608) ; U3A.5@52.758,33.444 U3A.4@54.028,33.444 54.028,31.728 v1(54,31.7) ; R11A.1@54.714,19.363 v1(54.714,20.582) 54.714,23.452 C12A.1@55.146,23.884 ; C12A.1@54.79,23.529 54.79,23.478 C12A.1@55.171,23.859 ; U6A.48@54.881,81.739 53.425,81.739 53.101,82.063 ; U6A.47@54.881,82.239 53.277,82.239 53.101,82.063 ; U6A.45@54.881,83.239 53.4,83.239 52.663,82.501 ; U6A.44@54.881,83.739 v1(52.364,83.739) 52.364,82.8 52.663,82.501 ; U6A.39@54.881,86.239 v1@56.642,86.239 ; v1(55.298,50.91) 55.306,50.902 U1A.4@55.898,50.902 ; v1(56.644,86.241) v1@56.642,86.239 ; U6A.35@56.731,88.589 56.731,87.069 56.642,86.979 v1@56.642,86.239 ; v1(57.1,73.3) 57.506,73.706 57.546,73.706 ; 57.533,73.694 57.546,73.706 ; U12A.1@58.204,73.706 57.546,73.706 ; U6A.5@58.231,80.389 58.231,83.104 v1(58.422,83.295) 59.007,83.295 59.698,82.604 59.698,80.422 U6A.8@59.731,80.389 ; v1@58.295,60.892 v1(58.321,60.917) ; v1(59.311,47.989) 59.806,48.483 U2A.4@60.302,48.483 ; v1(59.489,76.361) 59.494,76.361 59.504,76.35 U12A.4@59.504,75.256 ; v1(60.454,22.106) R20A.1@60.454,23.351 ; R17A.1@61.013,38.083 v1(61.013,39.15) ; U6A.12@61.731,80.389 61.731,78.806 62.17,78.367 v1(62.563,78.367) ; U6A.25@61.731,88.589 62.527,88.589 v1(62.537,88.578) ; U2A.2@62.842,48.483 62.842,49.335 v1(63.553,50.046) ; U6A.14@63.081,82.239 64.377,82.239 64.62,82.482 ; U6A.15@63.081,82.739 64.363,82.739 64.62,82.482 ; v1(63.579,70.773) v1@63.629,70.773 ; v1(63.932,21.031) 63.985,21.084 C17A.1@63.985,22.538 ; v1(65.44,82.475) 65.433,82.482 64.62,82.482 ; U4B.3@75.528,43.79 75.548,43.81 v1(75.548,45.042) ; R12B.1@76.869,62.67 77.961,62.67 v1(77.987,62.645) ; C8B.1@78.901,48.7 78.901,47.633 v1(78.926,47.608) ; U3B.5@79.358,33.444 U3B.4@80.628,33.444 80.628,31.728 v1(80.6,31.7) ; R11B.1@81.314,19.363 v1(81.314,20.582) 81.314,23.452 C12B.1@81.746,23.884 ; C12B.1@81.39,23.529 81.39,23.478 C12B.1@81.771,23.859 ; U6B.48@81.481,81.739 80.025,81.739 79.701,82.063 ; U6B.47@81.481,82.239 79.877,82.239 79.701,82.063 ; U6B.45@81.481,83.239 80,83.239 79.263,82.501 ; U6B.44@81.481,83.739 v1(78.964,83.739) 78.964,82.8 79.263,82.501 ; U6B.39@81.481,86.239 v1@83.242,86.239 ; v1(81.898,50.91) 81.906,50.902 U1B.4@82.498,50.902 ; v1(83.244,86.241) v1@83.242,86.239 ; U6B.35@83.331,88.589 83.331,87.069 83.242,86.979 v1@83.242,86.239 ; v1(83.7,73.3) 84.106,73.706 84.146,73.706 ; 84.133,73.694 84.146,73.706 ; U12B.1@84.804,73.706 84.146,73.706 ; U6B.5@84.831,80.389 84.831,83.104 v1(85.022,83.295) 85.607,83.295 86.298,82.604 86.298,80.422 U6B.8@86.331,80.389 ; v1@84.895,60.892 v1(84.921,60.917) ; v1(85.911,47.989) 86.406,48.483 U2B.4@86.902,48.483 ; v1(86.089,76.361) 86.094,76.361 86.104,76.35 U12B.4@86.104,75.256 ; v1(87.054,22.106) R20B.1@87.054,23.351 ; R17B.1@87.613,38.083 v1(87.613,39.15) ; U6B.12@88.331,80.389 88.331,78.806 88.77,78.367 v1(89.163,78.367) ; U6B.25@88.331,88.589 89.127,88.589 v1(89.137,88.578) ; U2B.2@89.442,48.483 89.442,49.335 v1(90.153,50.046) ; U6B.14@89.681,82.239 90.977,82.239 91.22,82.482 ; U6B.15@89.681,82.739 90.963,82.739 91.22,82.482 ; v1(90.179,70.773) v1@90.229,70.773 ; v1(90.246,21.285) 90.585,21.624 C17B.1@90.585,22.538 ; v1(92.04,82.475) 92.033,82.482 91.22,82.482 ; U4C.3@102.228,43.79 102.248,43.81 v1(102.248,45.042) ; R12C.1@103.569,62.67 104.661,62.67 v1(104.687,62.645) ; C8C.1@105.601,48.7 105.601,47.633 v1(105.626,47.608) ; U3C.5@106.058,33.444 U3C.4@107.328,33.444 107.328,31.728 v1(107.3,31.7) ; R11C.1@108.014,19.363 v1(108.014,20.582) 108.014,23.452 C12C.1@108.446,23.884 ; C12C.1@108.09,23.529 108.09,23.478 C12C.1@108.471,23.859 ; U6C.48@108.181,81.739 106.725,81.739 106.401,82.063 ; U6C.47@108.181,82.239 106.577,82.239 106.401,82.063 ; U6C.45@108.181,83.239 106.7,83.239 105.963,82.501 ; U6C.44@108.181,83.739 v1(105.664,83.739) 105.664,82.8 105.963,82.501 ; U6C.39@108.181,86.239 v1@109.942,86.239 ; v1(108.598,50.91) 108.606,50.902 U1C.4@109.198,50.902 ; v1(109.944,86.241) v1@109.942,86.239 ; U6C.35@110.031,88.589 110.031,87.069 109.942,86.979 v1@109.942,86.239 ; v1(110.4,73.3) 110.806,73.706 110.846,73.706 ; 110.833,73.694 110.846,73.706 ; U12C.1@111.504,73.706 110.846,73.706 ; U6C.5@111.531,80.389 111.531,83.104 v1(111.722,83.295) 112.307,83.295 112.998,82.604 112.998,80.422 U6C.8@113.031,80.389 ; v1@111.595,60.892 v1(111.621,60.917) ; v1(112.611,47.989) 113.106,48.483 U2C.4@113.602,48.483 ; v1(112.789,76.361) 112.794,76.361 112.804,76.35 U12C.4@112.804,75.256 ; v1(113.754,22.106) R20C.1@113.754,23.351 ; R17C.1@114.313,38.083 v1(114.313,39.15) ; U6C.12@115.031,80.389 115.031,78.806 115.47,78.367 v1(115.863,78.367) ; U6C.25@115.031,88.589 115.827,88.589 v1(115.837,88.578) ; U2C.2@116.142,48.483 116.142,49.335 v1(116.853,50.046) ; U6C.14@116.381,82.239 117.677,82.239 117.92,82.482 ; U6C.15@116.381,82.739 117.663,82.739 117.92,82.482 ; v1(116.879,70.773) v1@116.929,70.773 ; v1(117.272,21.133) 117.285,21.146 C17C.1@117.285,22.538 ; v1(118.74,82.475) 118.733,82.482 117.92,82.482 ; U4D.3@128.428,43.79 128.448,43.81 v1(128.448,45.042) ; R12D.1@129.769,62.67 130.861,62.67 v1(130.887,62.645) ; C8D.1@131.801,48.7 131.801,47.633 v1(131.826,47.608) ; U3D.5@132.258,33.444 U3D.4@133.528,33.444 133.528,31.728 v1(133.5,31.7) ; R11D.1@134.214,19.363 v1(134.214,20.582) 134.214,23.452 C12D.1@134.646,23.884 ; C12D.1@134.29,23.529 134.29,23.478 C12D.1@134.671,23.859 ; U6D.48@134.381,81.739 132.925,81.739 132.601,82.063 ; U6D.47@134.381,82.239 132.777,82.239 132.601,82.063 ; U6D.45@134.381,83.239 132.9,83.239 132.163,82.501 ; U6D.44@134.381,83.739 v1(131.864,83.739) 131.864,82.8 132.163,82.501 ; U6D.39@134.381,86.239 v1@136.142,86.239 ; v1(134.798,50.91) 134.806,50.902 U1D.4@135.398,50.902 ; v1(136.144,86.241) v1@136.142,86.239 ; U6D.35@136.231,88.589 136.231,87.069 136.142,86.979 v1@136.142,86.239 ; v1(136.6,73.3) 137.006,73.706 137.046,73.706 ; 137.033,73.694 137.046,73.706 ; U12D.1@137.704,73.706 137.046,73.706 ; U6D.5@137.731,80.389 137.731,83.104 v1(137.922,83.295) 138.507,83.295 139.198,82.604 139.198,80.422 U6D.8@139.231,80.389 ; v1@137.795,60.892 v1(137.821,60.917) ; v1(138.811,47.989) 139.306,48.483 U2D.4@139.802,48.483 ; v1(138.989,76.361) 138.994,76.361 139.004,76.35 U12D.4@139.004,75.256 ; v1(139.954,22.106) R20D.1@139.954,23.351 ; R17D.1@140.513,38.083 v1(140.513,39.15) ; U6D.12@141.231,80.389 141.231,78.806 141.67,78.367 v1(142.063,78.367) ; U6D.25@141.231,88.589 142.027,88.589 v1(142.037,88.578) ; U2D.2@142.342,48.483 142.342,49.335 v1(143.053,50.046) ; U6D.14@142.581,82.239 143.877,82.239 144.12,82.482 ; U6D.15@142.581,82.739 143.863,82.739 144.12,82.482 ; v1(143.079,70.773) v1@143.129,70.773 ; v1(143.459,21.006) 143.485,21.032 C17D.1@143.485,22.538 ; v1(144.94,82.475) 144.933,82.482 144.12,82.482 ; 52.663,82.501 53.101,82.063 ; 79.263,82.501 79.701,82.063 ; 105.963,82.501 106.401,82.063 ; 132.163,82.501 132.601,82.063
  Top Layer (.GTL) w0.635: C56.1@43.231,48.463 43.383,48.616 43.383,51.029 v1(45.263,51.029) ; J5.PC07@48.311,11.502 48.311,13.945 49.276,14.91 58.86,14.91 62.586,18.636 v1(62.586,20.625) ; v1(69.977,28.956) 70.002,28.931 C59.NEG@70.002,26.518 ; v1(121.3,20.1) 121.336,20.136 C57.2@121.336,22.225 ; v1(125,20) 125.019,20.019 C54.1@125.019,22.149
  Bottom Layer (.GBL) w0.254: v1@48.93,45.036 49.615,44.35 C11A.1@49.615,43.486 ; v1(49.6,31.7) 50.2,31.1 C5A.1@50.2,30.583 ; C14A.1@49.615,39.422 50.835,39.422 50.911,39.346 C13A.1@52.105,39.346 ; C30A.2@51.978,86.768 51.978,88.038 52.486,88.546 C29A.1@52.486,89.562 ; v1@52.345,83.732 51.978,83.364 C24A.2@51.978,82.45 52.486,81.942 C25A.1@52.486,80.418 ; v1(54,31.7) 54.74,31.7 55.139,31.301 55.832,31.301 C4A.1@56.55,30.583 ; v1@54.695,46.534 C3A.1@55.711,46.534 ; C20A.1@54.899,75.719 56.194,75.719 56.702,76.227 C48A.2@57.693,76.227 ; v1@54.975,67.845 55.305,67.845 C19A.2@56.372,68.912 ; C16A.2@56.372,60.784 56.473,60.885 v1@58.277,60.885 ; v1@56.626,86.234 56.981,85.879 C22A.1@60.233,85.879 ; C15A.1@57.312,39.219 v1@57.312,40.311 ; v1@58.302,60.911 58.302,62.714 C18A.2@58.404,62.816 ; v1(60.452,31.191) 60.487,31.226 C9A.2@60.487,34.774 ; C21A.2@60.995,76.227 61.833,76.227 62.544,76.938 v1@62.544,78.36 ; C28A.2@62.061,67.769 63.56,69.267 v1@63.56,70.766 ; C10A.NEG@63.281,42.394 63.281,40.235 v1@63.306,40.21 ; v1@63.611,70.766 63.662,70.817 C31A.1@64.855,70.817 ; v1@64.855,61.952 C26A.2@64.855,63.197 ; C23A.1@65.44,80.672 v1(65.44,82.475) v1@65.44,82.501 ; SW1.9@70.37,104.213 70.37,107.47 71.7,108.8 75.5,108.8 ; SW1.10@72.91,104.213 72.91,108.79 ; SW1.11@75.45,104.213 75.45,107.05 v1(75.5,107.1) 75.5,108.8 ; v1@75.53,45.036 76.215,44.35 C11B.1@76.215,43.486 ; v1(76.2,31.7) 76.8,31.1 C5B.1@76.8,30.583 ; C14B.1@76.215,39.422 77.435,39.422 77.511,39.346 C13B.1@78.705,39.346 ; SW1.12@77.99,104.213 77.99,108.79 78,108.8 ; C30B.2@78.578,86.768 78.578,88.038 79.086,88.546 C29B.1@79.086,89.562 ; v1@78.945,83.732 78.578,83.364 C24B.2@78.578,82.45 79.086,81.942 C25B.1@79.086,80.418 ; SW1.13@80.53,104.213 80.53,107.47 79.2,108.8 78,108.8 ; v1(80.6,31.7) 81.34,31.7 81.739,31.301 82.432,31.301 C4B.1@83.15,30.583 ; v1@81.295,46.534 C3B.1@82.311,46.534 ; C20B.1@81.499,75.719 82.794,75.719 83.302,76.227 C48B.2@84.293,76.227 ; v1@81.575,67.845 81.905,67.845 C19B.2@82.972,68.912 ; C16B.2@82.972,60.784 83.073,60.885 v1@84.877,60.885 ; v1@83.226,86.234 83.581,85.879 C22B.1@86.833,85.879 ; C15B.1@83.912,39.219 v1@83.912,40.311 ; v1@84.902,60.911 84.902,62.714 C18B.2@85.004,62.816 ; v1(87.071,30.785) 87.087,30.8 C9B.2@87.087,34.774 ; C21B.2@87.595,76.227 88.433,76.227 89.144,76.938 v1@89.144,78.36 ; C28B.2@88.661,67.769 90.16,69.267 v1@90.16,70.766 ; C10B.NEG@89.881,42.394 89.881,40.235 v1@89.906,40.21 ; v1@90.211,70.766 90.262,70.817 C31B.1@91.455,70.817 ; v1@91.455,61.952 C26B.2@91.455,63.197 ; C23B.1@92.04,80.672 v1(92.04,82.475) v1@92.04,82.501 ; v1@102.23,45.036 102.915,44.35 C11C.1@102.915,43.486 ; v1(102.9,31.7) 103.5,31.1 C5C.1@103.5,30.583 ; C14C.1@102.915,39.422 104.135,39.422 104.211,39.346 C13C.1@105.405,39.346 ; C30C.2@105.278,86.768 105.278,88.038 105.786,88.546 C29C.1@105.786,89.562 ; v1@105.645,83.732 105.278,83.364 C24C.2@105.278,82.45 105.786,81.942 C25C.1@105.786,80.418 ; v1(107.3,31.7) 108.04,31.7 108.439,31.301 109.132,31.301 C4C.1@109.85,30.583 ; v1@107.995,46.534 C3C.1@109.011,46.534 ; C20C.1@108.199,75.719 109.494,75.719 110.002,76.227 C48C.2@110.993,76.227 ; v1@108.275,67.845 108.605,67.845 C19C.2@109.672,68.912 ; C16C.2@109.672,60.784 109.773,60.885 v1@111.577,60.885 ; v1@109.926,86.234 110.281,85.879 C22C.1@113.533,85.879 ; C15C.1@110.612,39.219 v1@110.612,40.311 ; v1@111.602,60.911 111.602,62.714 C18C.2@111.704,62.816 ; C9C.2@113.787,34.774 113.787,30.79 v1(113.817,30.759) ; C21C.2@114.295,76.227 115.133,76.227 115.844,76.938 v1@115.844,78.36 ; C28C.2@115.361,67.769 116.86,69.267 v1@116.86,70.766 ; C10C.NEG@116.581,42.394 116.581,40.235 v1@116.606,40.21 ; v1@116.911,70.766 116.962,70.817 C31C.1@118.155,70.817 ; v1@118.155,61.952 C26C.2@118.155,63.197 ; C23C.1@118.74,80.672 v1(118.74,82.475) v1@118.74,82.501 ; v1@128.43,45.036 129.115,44.35 C11D.1@129.115,43.486 ; v1(129.1,31.7) 129.7,31.1 C5D.1@129.7,30.583 ; C14D.1@129.115,39.422 130.335,39.422 130.411,39.346 C13D.1@131.605,39.346 ; C30D.2@131.478,86.768 131.478,88.038 131.986,88.546 C29D.1@131.986,89.562 ; v1@131.845,83.732 131.478,83.364 C24D.2@131.478,82.45 131.986,81.942 C25D.1@131.986,80.418 ; v1(133.5,31.7) 134.24,31.7 134.639,31.301 135.332,31.301 C4D.1@136.05,30.583 ; v1@134.195,46.534 C3D.1@135.211,46.534 ; C20D.1@134.399,75.719 135.694,75.719 136.202,76.227 C48D.2@137.193,76.227 ; v1@134.475,67.845 134.805,67.845 C19D.2@135.872,68.912 ; C16D.2@135.872,60.784 135.973,60.885 v1@137.777,60.885 ; v1@136.126,86.234 136.481,85.879 C22D.1@139.733,85.879 ; C15D.1@136.812,39.219 v1@136.812,40.311 ; v1@137.802,60.911 137.802,62.714 C18D.2@137.904,62.816 ; v1(139.954,30.632) 139.987,30.665 C9D.2@139.987,34.774 ; C21D.2@140.495,76.227 141.333,76.227 142.044,76.938 v1@142.044,78.36 ; C28D.2@141.561,67.769 143.06,69.267 v1@143.06,70.766 ; C10D.NEG@142.781,42.394 142.781,40.235 v1@142.806,40.21 ; v1@143.111,70.766 143.162,70.817 C31D.1@144.355,70.817 ; v1@144.355,61.952 C26D.2@144.355,63.197 ; C23D.1@144.94,80.672 v1(144.94,82.475) v1@144.94,82.501 ; 75.5,108.8 78,108.8
  Bottom Layer (.GBL) w0.635: v1(28.016,39.167) C35.1@29.083,38.1 32.08,38.1 34.061,40.081 v1(34.061,54.686) ; C58.2@96.215,21.412 v1(97.388,21.412) C53.1@98.679,21.412
  other v1: 50.929,39.353 77.529,39.353 104.229,39.353 130.429,39.353 63.325,40.216 89.925,40.216 116.625,40.216 142.825,40.216 57.33,40.318 83.93,40.318 110.63,40.318 136.83,40.318 54.714,46.541 81.314,46.541 108.014,46.541 134.214,46.541 64.874,61.959 91.474,61.959 118.174,61.959 144.374,61.959 54.993,67.852 81.593,67.852 108.293,67.852 134.493,67.852 56.39,75.903 82.99,75.903 109.69,75.903 135.89,75.903 51.996,88.045 78.596,88.045 105.296,88.045 131.496,88.045
ADC_DAT0: J5.154 U14.37 | length 93.9
  Top Layer (.GTL) w0.127: v1(14.148,67.97) 14.15,67.973 U14.37@14.15,69.475
  Bottom Layer (.GBL) w0.127: v1(14.148,67.97) 13.2,67.023 13.2,26.9 19.17,20.93 37.719,20.93 42.761,15.888 46.395,15.888 46.397,15.889 54.711,15.889 55.804,14.796 55.804,13.026 56.168,12.662 56.251,12.662 56.348,12.565 J5.154@56.348,11.729
ADC_DAT1: J5.152 U14.38 | length 95.1
  Top Layer (.GTL) w0.127: v1(14.122,67.107) 14.65,67.634 U14.38@14.65,69.475
  Bottom Layer (.GBL) w0.127: v1(14.122,67.107) 13.513,66.497 13.513,26.987 19.342,21.158 37.814,21.158 40.145,18.827 42.856,16.116 46.301,16.116 46.302,16.118 55.898,16.118 56.032,15.984 56.032,15.447 57.442,14.038 57.442,13.648 56.983,13.189 J5.152@56.983,11.729
ADC_DAT2: J5.150 U14.39 | length 95
  Top Layer (.GTL) w0.127: v1(14.91,67.208) 15.15,67.449 U14.39@15.15,69.475
  Bottom Layer (.GBL) w0.127: v1(14.91,67.208) 13.741,66.04 13.741,27.082 19.436,21.387 37.908,21.387 40.373,18.922 42.95,16.345 46.206,16.345 46.207,16.346 55.993,16.346 56.261,16.078 56.261,15.542 57.671,14.132 57.671,11.783 J5.150@57.618,11.729
ADC_DAT3: J5.148 U14.40 | length 95.2
  Top Layer (.GTL) w0.127: v1(14.707,66.319) 14.707,66.341 15.65,67.284 U14.40@15.65,69.475
  Bottom Layer (.GBL) w0.127: v1(14.707,66.319) 13.97,65.583 13.97,27.177 19.531,21.615 38.003,21.615 40.602,19.017 43.045,16.573 46.111,16.573 46.112,16.575 56.088,16.575 56.49,16.173 56.49,15.637 58.253,13.874 J5.148@58.253,11.729
ADC_DAT4: J5.144 U14.41 | length 95.8
  Top Layer (.GTL) w0.127: v1(15.519,66.472) 16.15,67.102 U14.41@16.15,69.475
  Bottom Layer (.GBL) w0.127: v1(15.519,66.472) 15.519,65.938 14.199,64.618 14.199,27.271 19.626,21.844 38.098,21.844 40.831,19.111 43.14,16.802 46.016,16.802 46.018,16.803 56.183,16.803 56.718,16.268 56.718,15.731 59.523,12.927 J5.144@59.523,11.729
ADC_DAT5: J5.142 U14.42 | length 96.1
  Top Layer (.GTL) w0.127: v1(15.621,65.354) 16.65,66.383 U14.42@16.65,69.475
  Bottom Layer (.GBL) w0.127: v1(15.621,65.354) 14.427,64.16 14.427,27.366 19.721,22.073 38.192,22.073 41.059,19.206 43.234,17.031 45.922,17.031 45.923,17.032 56.277,17.032 56.947,16.362 56.947,15.826 60.158,12.615 J5.142@60.158,11.729
ADC_DAT6: J5.140 U14.43 | length 96.4
  Top Layer (.GTL) w0.127: v1(16.51,65.557) 17.15,66.197 U14.43@17.15,69.475
  Bottom Layer (.GBL) w0.127: v1(16.51,65.557) 14.656,63.703 14.656,27.461 19.815,22.301 38.287,22.301 41.288,19.301 43.329,17.259 45.827,17.259 45.828,17.261 56.372,17.261 57.175,16.457 57.175,15.921 60.793,12.304 J5.140@60.793,11.729
ADC_DAT7: J5.138 U14.44 | length 97.2
  Top Layer (.GTL) w0.127: v1(16.281,64.618) 16.281,64.622 16.26,64.643 17.65,66.033 U14.44@17.65,69.475
  MidLayer1 (.G1) w0.127: v1@16.256,64.643 v1(16.281,64.618)
  Bottom Layer (.GBL) w0.127: v1(16.281,64.618) 15.951,64.618 14.884,63.551 14.884,27.555 19.91,22.53 38.382,22.53 41.516,19.395 43.424,17.488 45.732,17.488 45.734,17.489 56.467,17.489 57.404,16.552 57.404,16.015 60.625,12.794 60.901,12.794 61.13,12.565 61.428,12.565 J5.138@61.428,11.729
ASP_SEL_N: J5.43 Q1.1 U9.27 U14.72 | length 166.3
  Top Layer (.GTL) w0.254: U9.27@31.375,42.56 31.39,42.545 32.878,42.545 v1(32.893,42.56) 33.782,42.56 39.792,42.56 43.332,39.02 43.332,35.738 44.399,34.671 44.399,21.039 49.614,15.824 v1(58.75,15.824) ; v1(31.623,67.945) 31.623,69.448 U14.72@31.65,69.475 ; J5.43@100.937,11.756 v1(100.937,15.796) ; Q1.1@138.252,12.776 139.725,14.249 v1(139.725,17.094)
  Bottom Layer (.GBL) w0.254: v1(31.623,67.945) 32.893,66.675 v1(32.893,42.56) ; v1(58.75,15.824) 58.778,15.796 v1(100.937,15.796) 117.633,15.796 118.372,16.535 139.167,16.535 v1(139.725,17.094)
CH1_BIAS_ADJ: R6A.2 TP2A.1 U9.12 | length 74.5
  Top Layer (.GTL) w0.254: v1(23.622,26.518) 23.622,39.192 24.225,39.795 U9.12@24.225,41.56 ; R6A.2@62.715,36.254 65.255,33.714 TP2A.1@65.255,26.983
  Bottom Layer (.GBL) w0.254: v1(23.622,26.518) 27.203,26.518 27.407,26.721 37.678,26.721 43.774,20.625 45.364,20.625 46.804,19.185 55.976,19.185 58.191,21.4 58.191,22.825 62.35,26.983 TP2A.1@65.255,26.983
CH1_OUT: J5.17 R13A.1 U3A.3 U13A.1 | length 85.6
  Top Layer (.GTL) w0.254: v1(53.393,21.776) R13A.1@53.393,23.097 ; U3A.3@55.298,33.444 55.298,31.834 55.364,31.9 v1(55.4,31.9) ; v1(63.68,31.606) U13A.1@63.68,33.294 ; J5.17@109.192,12.384 J5.17@109.192,11.756 v1@109.192,13.104
  MidLayer1 (.G1) w0.254: v1(53.393,21.776) 63.216,31.599 63.662,31.599 63.361,31.9 v1(55.4,31.9) ; v1@63.667,31.593 72.314,22.947 72.314,17.907 75.311,14.91 85.369,14.91 86.055,14.224 108.077,14.224 v1(109.195,13.106)
CH2_BIAS_ADJ: R6B.2 TP2B.1 U9.13 | length 101.9
  Top Layer (.GTL) w0.254: v1(24.409,27.102) 24.409,38.329 25.05,38.969 U9.13@25.05,40.735 ; R6B.2@89.315,36.254 91.855,33.714 TP2B.1@91.855,26.983
  Bottom Layer (.GBL) w0.254: v1(24.409,27.102) 24.435,27.076 37.572,27.076 37.826,27.076 41.654,23.248 48.666,23.248 50.189,21.725 52.588,21.725 53.172,22.309 57.173,22.309 63.566,28.702 66.472,28.702 67.005,28.169 67.015,28.169 71.638,23.546 74.244,23.546 76.065,21.725 78.706,21.725 80.527,23.546 85.005,23.546 88.4,26.941 88.4,26.983 TP2B.1@91.855,26.983
CH2_OUT: J5.13 R13B.1 U3B.3 U13B.1 | length 59.5
  Top Layer (.GTL) w0.254: v1(79.993,21.776) R13B.1@79.993,23.097 ; U3B.3@81.898,33.444 81.898,31.834 v1@81.964,31.9 ; v1(90.28,31.606) U13B.1@90.28,33.294 ; J5.13@110.462,11.756 110.462,13.18 v1(110.465,13.183)
  MidLayer1 (.G1) w0.254: v1@79.975,21.769 81.295,21.769 ; v1(90.28,31.606) 89.986,31.9 v1(82,31.9) 82.54,31.36 82.54,23.014 81.295,21.769 ; v1(110.465,13.183) 107.213,16.434 87.655,16.434 82.32,21.769 81.295,21.769
CH3_BIAS_ADJ: R6C.2 TP2C.1 U9.14 | length 127.8
  Top Layer (.GTL) w0.254: v1(25.171,27.61) 25.171,38.329 25.55,38.707 U9.14@25.55,40.735 ; R6C.2@116.015,36.254 118.555,33.714 TP2C.1@118.555,26.983
  Bottom Layer (.GBL) w0.254: v1(25.171,27.61) 25.222,27.559 37.846,27.559 41.58,23.825 58.186,23.825 63.419,29.058 66.629,29.058 71.786,23.901 84.858,23.901 ; 84.824,23.91 89.235,28.321 98.527,28.321 102.938,23.91 115.482,23.91 TP2C.1@118.555,26.983
CH3_OUT: J5.7 R13C.1 U3C.3 U13C.1 | length 39.8
  Top Layer (.GTL) w0.254: R13C.1@106.693,23.097 v1(106.693,21.776) 106.693,14.897 107.239,14.351 111.684,14.351 112.367,13.668 J5.7@112.367,11.756 ; U3C.3@108.598,33.444 108.598,31.834 108.664,31.9 v1(108.7,31.9) ; v1(116.98,31.606) U13C.1@116.98,33.294
  MidLayer1 (.G1) w0.254: v1@106.675,21.769 107.995,21.769 109.24,23.014 109.24,31.167 ; v1@108.58,31.828 109.24,31.167 ; v1@116.962,31.599 109.672,31.599 109.24,31.167
CH4_BIAS_ADJ: R6D.2 TP2D.1 U9.15 | length 155.9
  Top Layer (.GTL) w0.254: v1(26.01,28.092) 26.01,40.695 U9.15@26.05,40.735 ; R6D.2@142.215,36.254 144.755,33.714 TP2D.1@144.755,26.983
  Bottom Layer (.GBL) w0.254: v1(26.01,28.092) 46.362,28.092 50.189,24.265 58.123,24.265 63.271,29.413 66.777,29.413 71.925,24.265 84.677,24.265 89.088,28.677 99.077,28.677 103.489,24.265 111.209,24.265 115.494,28.55 125.404,28.55 129.689,24.265 142.037,24.265 TP2D.1@144.755,26.983